# Altium PCB PCB(含有CH340).pcbdoc
Units mil, origin at the board's own origin, x right, y up, seen from the top; angles counter-clockwise.
Board outline 3285.7 x 2277.93 mil, 2 copper layers (Top Layer, Bottom Layer); 53 components, 51 nets, 198 pads, 38 vias.
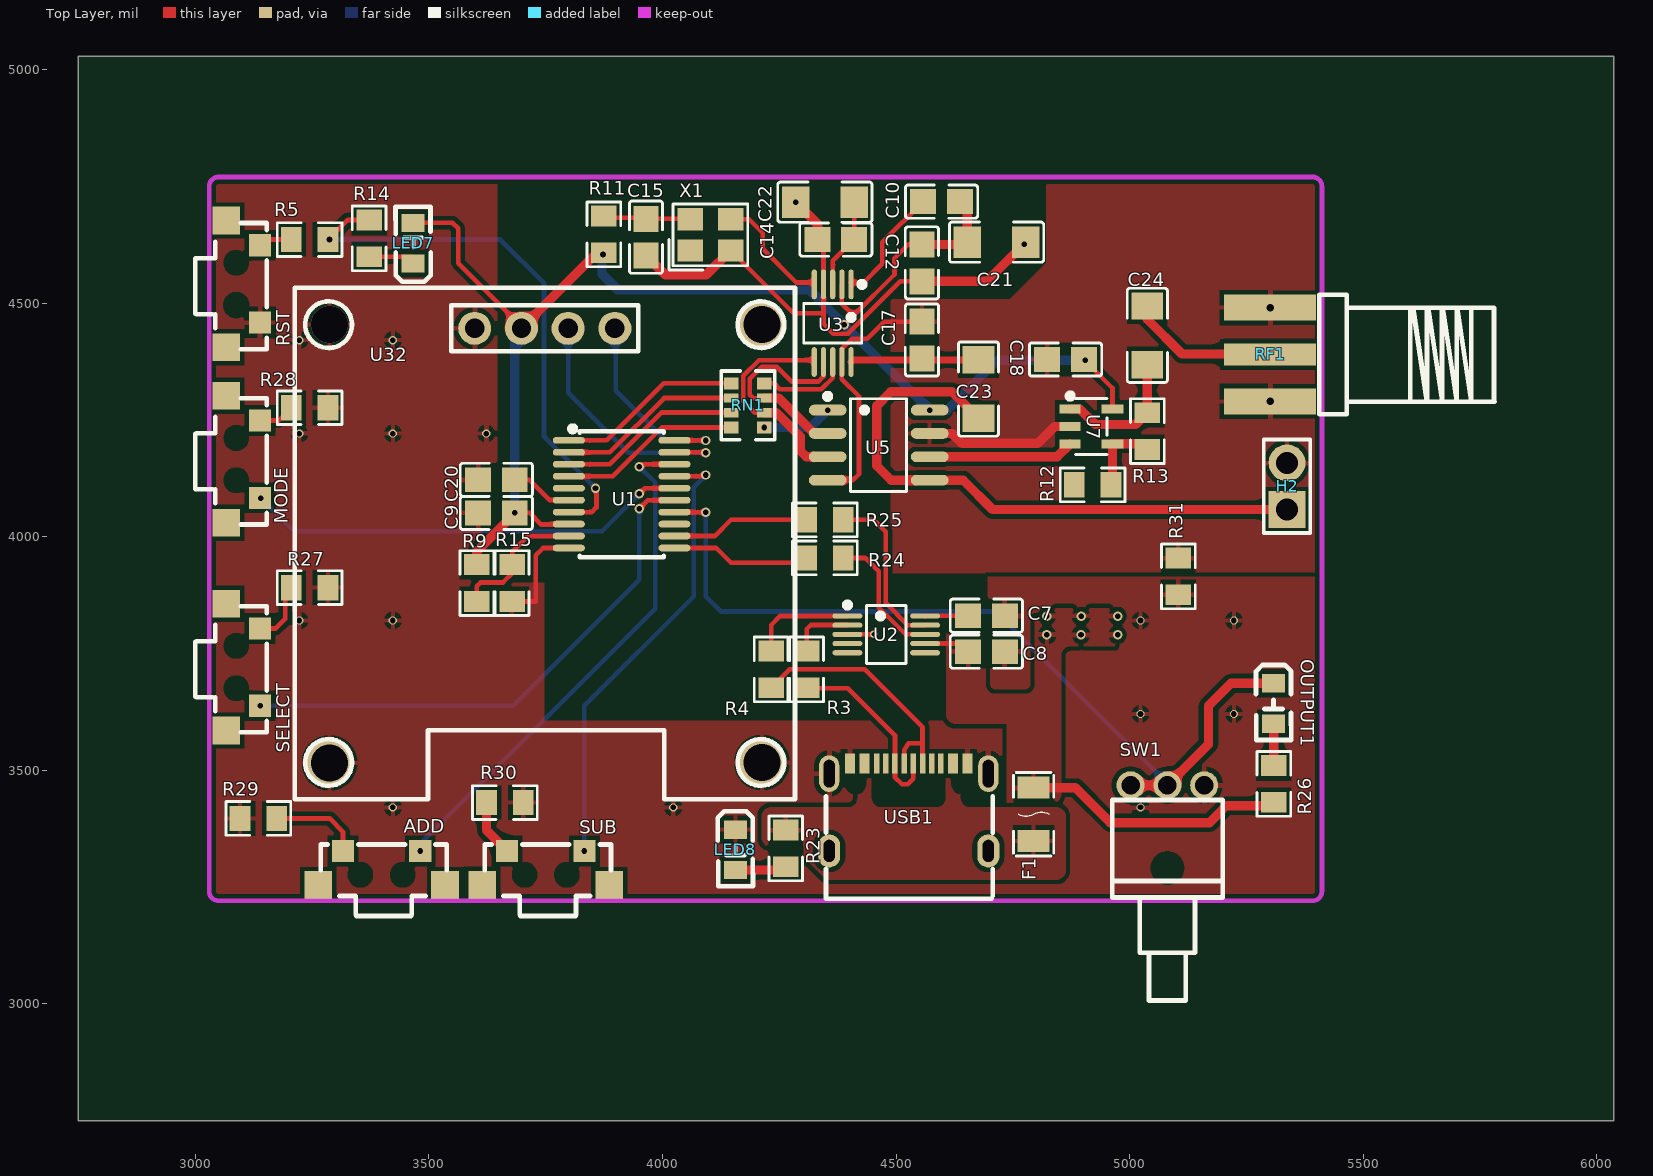
[diagram p0: Top Layer view]
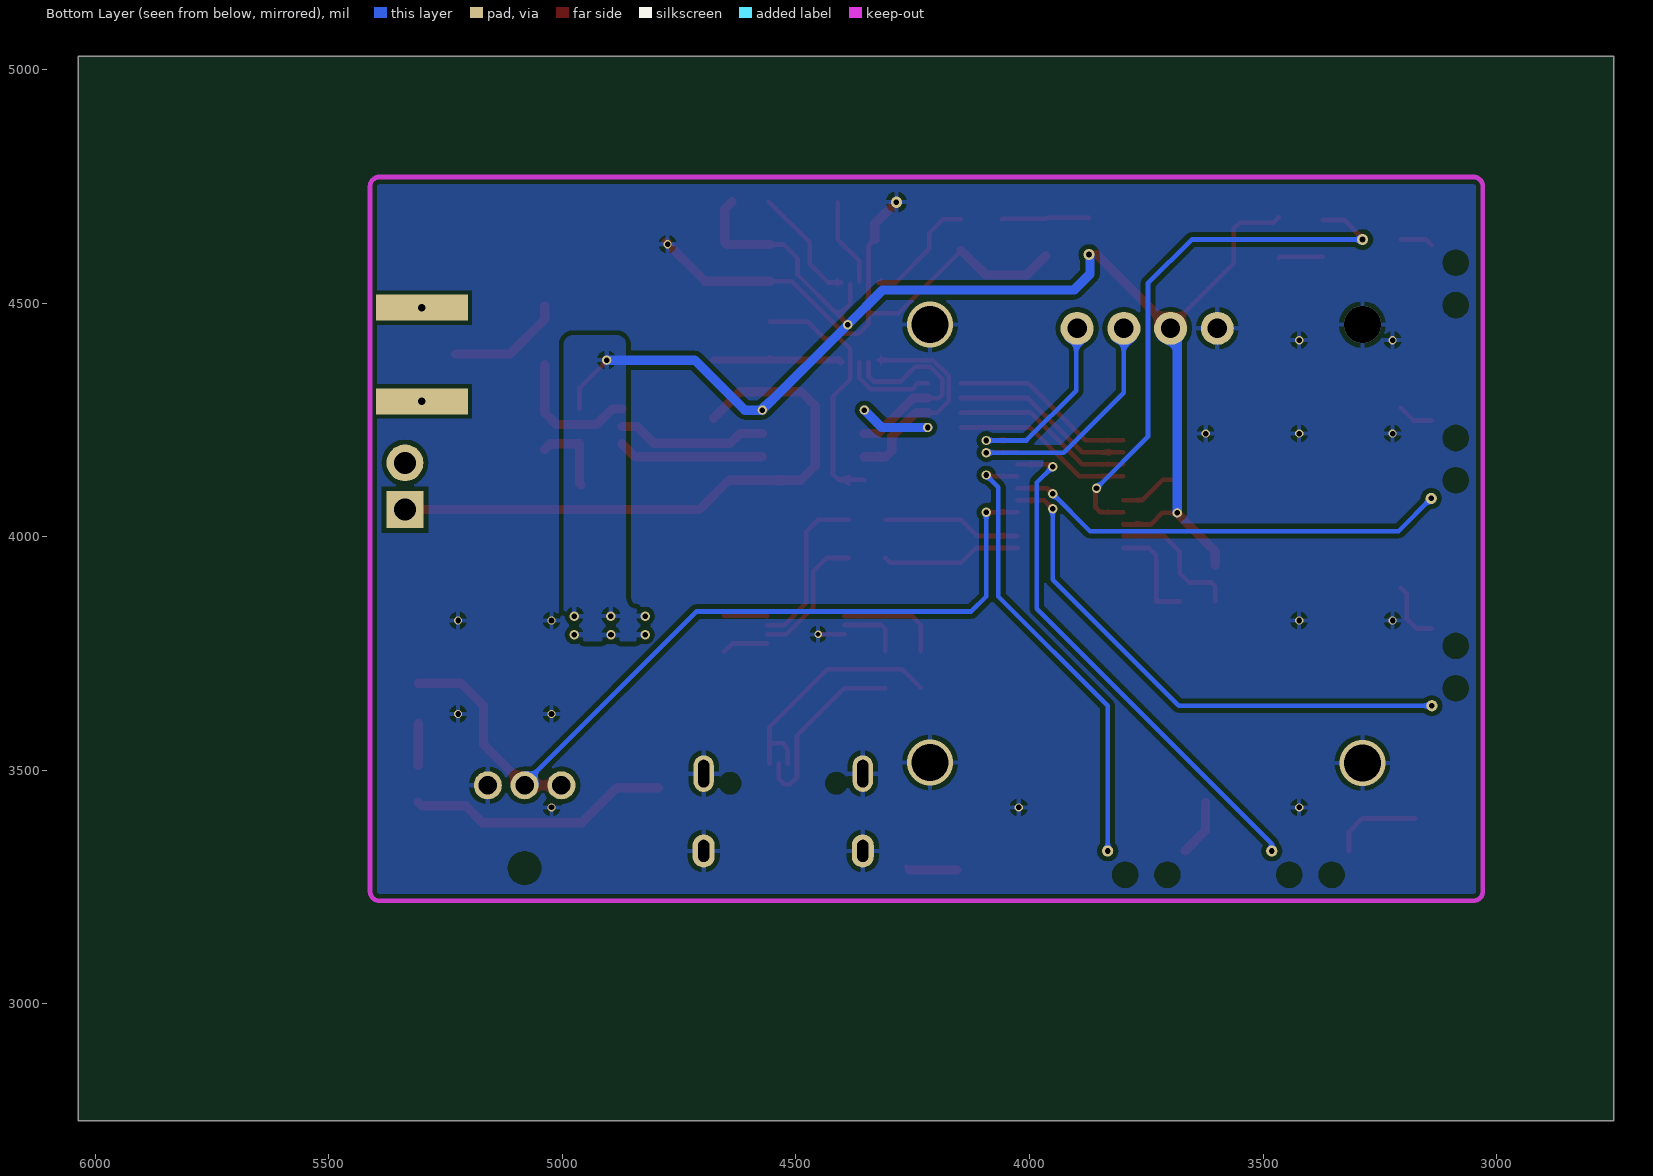
[diagram p1: Bottom Layer view, seen from below]

## Layer stack, top to bottom
Top Solder Mask Layer: solder mask 0.4, Solder Resist, Dk 3.5
Top Layer: signal copper 1.4
Dielectric1: dielectric 12.6, FR-4, Dk 4.8
Bottom Layer: signal copper 1.4
Bottom Solder Mask Layer: solder mask 0.4, Solder Resist, Dk 3.5

## Board outline
6035.7,2750 2750,2750 2750,5027.93 6035.7,5027.93

## Design rules (kind name [scope] priority, off if disabled: settings)
Clearance [All] p1: gap=10 ignorepadtopadclearanceinfootprint=FALSE except(0: Arc-Hole Track-Hole SMDPad-Hole THPad-Hole Via-Hole Fill-Hole Poly-Hole Region-Hole Text-Hole)
PolygonConnect [All] p1: connectstyle=Relief reliefconductorwidth=10 reliefentries=4 polygonreliefangle="90 Angle" airgapwidth=10
RoutingVias [All] p1: holewidth=28 width=50 viastyle="Through Hole" minholewidth=28 minwidth=50 maxholewidth=28 maxwidth=50
SolderMaskExpansion [All] p1: expansion=4 istentingtop=FALSE
Width [All] p1: maxlimit=50 minlimit=10 preferedwidth=10
30 further rules are at their usual default settings.

## Components (designator, comment, footprint, x,y, rotation, side; value= is the part's Value field where it differs from the comment)
ADD "TS-1087B-B2D2" KEY-SMD_4P-L7.8-W2.8-P4.20-EH 3398.92,3290.93 r180 top
C7 "0805B104K500NT" C0805 4693.33,3830.93 r0 top
C8 "0805B104K500NT" C0805 4693.33,3753.84 r0 top
C9 "0805B104K500NT" C0805 3644.56,4050.93 r0 top
C10 "0805B104K500NT" C0805 4597.34,4717.02 r180 top
C12 "0805B104K500NT" C0805 4555.42,4585.93 r90 top
C14 "0805B104K500NT" C0805 4371.03,4635.93 r0 top
C15 "0805B104K500NT" C0805 3964.86,4640.93 r90 top
C17 "0805B104K500NT" C0805 4555.42,4420.93 r270 top
C18 "0805B104K500NT" C0805 4862.7,4379.2 r180 top
C20 "0805B104K500NT" C0805 3644.56,4121.76 r0 top
C21 "CL31A106KBHNNNE" C1206 4715.18,4630.22 r180 top
C22 "CL31A106KBHNNNE" C1206 4347.7,4715.93 r0 top
C23 "CL31A106KBHNNNE" C1206 4676.34,4315.93 r270 top
C24 "CL31A106KBHNNNE" C1206 5037.7,4430.93 r90 top
F1 "nSMD010" F1206 4794.41,3405.93 r270 top
H2 "PZ254V-11-02P" HDR-TH_2P-P2.54-V-M 5336.7,4108 r90 top
LED7 "LED_B" LED_0805 3466.7,4629.89 r90 top
LED8 "LED_B" LED_0805 4155.92,3327.89 r270 top
MODE "TS-1087B-B2D2" KEY-SMD_4P-L7.8-W2.8-P4.20-EH 3102.7,4165.93 r90 top
OUTPUT1 "LED_B" LED_0805 5307.7,3640.9 r270 top
R3 "0805W8F1001T5E" R0805 4308.66,3715.93 r270 top
R4 "0805W8F1001T5E" R0805 4232.7,3715.93 r270 top
R5 "0805W8F1001T5E" R0805 3245.02,4635.93 r0 top
R9 "0805W8F1001T5E" R0805 3602.7,3900.73 r270 top
R11 "0805W8F1001T5E" R0805 3874.7,4647.14 r90 top
R12 "0805W8F1001T5E" R0805 4920.74,4110.93 r0 top
R13 "0805W8F1001T5E" R0805 5037.7,4225.81 r90 top
R14 "0805W8F1001T5E" R0805 3372.45,4638.54 r90 top
R15 "0805W8F1001T5E" R0805 3678.33,3900.73 r270 top
R23 "0805W8F1001T5E" R0805 4263.93,3333 r90 top
R24 "0805W8F1001T5E" R0805 4347.7,3954.52 r0 top
R25 "0805W8F1001T5E" R0805 4347.7,4035.93 r0 top
R26 "0805W8F1001T5E" R0805 5308.38,3470.93 r270 top
R27 "0805W8F1001T5E" R0805 3245.02,3890.93 r180 top
R28 "0805W8F1001T5E" R0805 3245.02,4275.93 r180 top
R29 "0805W8F1001T5E" R0805 3135.32,3396.93 r0 top
R30 "0805W8F1001T5E" R0805 3662.7,3430.93 r180 top
R31 "0805W8F0000T5E" R0805 5104.02,3915.15 r90 top
RF1 "KH-SMA-KE8-G" CONN-SMD_KH-SMA-KE8-G 5300.7,4389.93 r270 top
RN1 "4D03WGJ0331T5E" RES-ARRAY-SMD_0603-8P-L3.2-W1.6-BL 4182.7,4280.93 r270 top
RST "TS-1087B-B2D2" KEY-SMD_4P-L7.8-W2.8-P4.20-EH 3102.7,4540.93 r90 top
SELECT "TS-1087B-B2D2" KEY-SMD_4P-L7.8-W2.8-P4.20-EH 3102.7,3720.93 r90 top
SUB "TS-1087B-B2D2" KEY-SMD_4P-L7.8-W2.8-P4.20-EH 3750.19,3290.93 r180 top
SW1 "XKB5858-Z-C" SW-TH_XKB5858-Z-C 5080.7,3467.93 r180 top
U1 "STC8H8K64U-45I-TSSOP20" TSSOP-20_L6.5-W4.4-P0.65-LS6.5-BL 3912.7,4090.93 r270 top
U2 "CH340E" MSOP-10_L3.0-W3.0-P0.50-LS5.0-BL 4479.03,3790.93 r270 top
U3 "AD9833BRMZ" MSOP-10_L3.0-W3.0-P0.50-LS5.0-BL 4364.37,4456.93 r180 top
U5 "MCP41010T-I/SN" SOIC-8_L4.9-W3.9-P1.27-LS6.0-BL 4462.7,4195.93 r270 top
U7 "CBM8051AST5" SOT-23-5_L3.0-W1.7-P0.95-LS2.8-BL 4917.7,4235.93 r270 top
U32 "HS96L03W2C03" OLED-TH_L27.8-W27.2-P2.54_C9900033791 3748.19,4445.93 r0 top
USB1 "TYPE-C 16PIN 2MD(073)" USB-C-SMD_TYPE-C-6PIN-2MD-073 4527.16,3420.93 r0 top
X1 "SX32Y025000BK1T" CRYSTAL-SMD_4P-L3.2-W2.5-BL 4102.7,4645.93 r0 top

## Footprints (in the part's own frame and the unit in brackets; to place one, negate y for a bottom-side part, rotate by r counter-clockwise, add the part's x,y. Pads: shape width x height; smd on the part's side, far side on the other; paste and mask are expansions set on the pad)
C0805 [mm]
  rect 1.41x1.35 smd paste-100 mask+0.051: 1(-1,0) 2(1,0)
  silkscreen extent -1.96,-0.9 1.96,0.9
C1206 [mm]
  rect 1.485x1.728 smd paste-100 mask+0.051: 1(-1.593,0) 2(1.593,0)
  silkscreen extent -2.56,-1.09 2.56,1.09
CONN-SMD_KH-SMA-KE8-G [mm]
  rect 1.4x5 smd paste+0 mask+0.05: 1(-2.55,0) 2(2.55,0)
  rect 1.4x5 smd far side paste+0 mask+0.05: 3(-2.55,0) 4(2.55,0)
  rect 1.2x5 smd paste+0 mask+0.05: 5(0,0)
  silkscreen extent -3.25,2.67 3.25,12.19
CRYSTAL-SMD_4P-L3.2-W2.5-BL [mm]
  rect 1.4x1.2 smd mask+0.076: 1(-1.1,-0.85) 2(1.1,-0.85) 3(1.1,0.85) 4(-1.1,0.85)
  silkscreen extent -2.26,-1.91 2.03,1.68
F1206 [mm]
  rect 1.19x1.728 smd paste+0 mask+0.051: 1(-1.445,0) 2(1.445,0)
  silkscreen extent -2.27,-1.09 2.27,1.09
HDR-TH_2P-P2.54-V-M [mm]
  rect 2x2 hole 1.2 mask+0.076: 1(-1.27,0)
  round 2 hole 1.2 mask+0.076: 2(1.27,0)
  silkscreen extent -2.54,-1.27 2.54,1.27
KEY-SMD_4P-L7.8-W2.8-P4.20-EH [mm]
  rect 1.2x1.2 smd mask+0.076: 1(-2.101,-0.924) 2(2.101,-0.924)
  rect 1.5x1.5 smd mask+0.076: 3(-3.449,0.924) 4(3.449,0.924)
  silkscreen extent -3.55,-1.27 3.31,2.61
LED_0805 [mm]
  rect 1x1.25 smd paste+0 mask+0.051: 1(-1.15,0.005) 2(1.05,0.005)
  silkscreen extent -2.15,-0.94 1.93,0.97
MSOP-10_L3.0-W3.0-P0.50-LS5.0-BL [mm]
  oval 0.28x1.62 smd mask+0.076: 1(-1,-2.11) 2(-0.5,-2.11) 3(0,-2.11) 4(0.5,-2.11) 5(1,-2.11) 6(1,2.11) 7(0.5,2.11) 8(0,2.11) 9(-0.5,2.11) 10(-1,2.11)
  silkscreen extent -1.74,-2.26 1.58,1.07
OLED-TH_L27.8-W27.2-P2.54_C9900033791 [mm]
  round 1.8 hole 1.05 paste+0 mask+0.05: 1(-3.81,0) 2(-1.27,0) 3(1.27,0) 4(3.81,0)
  silkscreen extent -13.6,-25.6 13.6,2.2
R0805 [mm]
  rect 1.133x1.377 smd paste-100 mask+0.051: 1(-1,0) 2(1,0)
  silkscreen extent -1.76,-0.92 1.76,0.92
RES-ARRAY-SMD_0603-8P-L3.2-W1.6-BL [mm]
  rect 0.65x0.8 smd mask+0.076: 1(-1.2,-0.9) 4(1.2,-0.9) 5(1.2,0.9) 8(-1.2,0.9)
  rect 0.5x0.8 smd mask+0.076: 2(-0.4,-0.9) 3(0.4,-0.9) 6(0.4,0.9) 7(-0.4,0.9)
  silkscreen extent -1.87,-1.45 1.87,1.47
SOIC-8_L4.9-W3.9-P1.27-LS6.0-BL [mm]
  oval 0.588x2.045 smd mask+0.076: 1(-1.905,-2.772) 2(-0.635,-2.772) 3(0.635,-2.772) 4(1.905,-2.772) 5(1.905,2.772) 6(0.635,2.772) 7(-0.635,2.772) 8(-1.905,2.772)
  silkscreen extent -2.8,-2.92 2.53,1.52
SOT-23-5_L3.0-W1.7-P0.95-LS2.8-BL [mm]
  rect 0.49x1.157 smd mask+0.076: 1(-0.95,-1.154) 2(0,-1.154) 3(0.95,-1.154)
  rect 0.49x1.175 smd mask+0.076: 4(0.95,1.154) 5(-0.95,1.154)
  silkscreen extent -1.8,-1.29 1.53,0.85
SW-TH_XKB5858-Z-C [mil]
  round 60 hole 39.37 mask+3: 1(78.74,0) 2(0,0) 3(-78.74,0)
  silkscreen extent -118,31 118,461
TSSOP-20_L6.5-W4.4-P0.65-LS6.5-BL [mil]
  oval 14.33x68.58 smd mask+3: 1(-115.16,-113.03) 2(-89.57,-113.03) 3(-63.98,-113.03) 4(-38.39,-113.03) 5(-12.79,-113.03) 6(12.8,-113.03) 7(38.39,-113.03) 8(63.98,-113.03) 9(89.57,-113.03) 10(115.16,-113.03) 11(115.16,113.03) 12(89.57,113.03) 13(63.98,113.03) 14(38.39,113.03) 15(12.8,113.03) 16(-12.79,113.03) 17(-38.39,113.03) 18(-63.98,113.03) 19(-89.57,113.03) 20(-115.16,113.03)
  silkscreen extent -146,-111 135,90
USB-C-SMD_TYPE-C-6PIN-2MD-073 [mm]
  rect 0.55x1.1 smd paste-100 mask+0.05: 1(-3.2,2.375) 2(-2.4,2.375) 11(2.4,2.375) 12(3.2,2.375)
  rect 0.3x1.1 smd paste-100 mask+0.05: 3(-1.75,2.375) 4(-1.25,2.375) 5(-0.75,2.375) 6(-0.25,2.375) 7(0.25,2.375) 8(0.75,2.375) 9(1.25,2.375) 10(1.75,2.375)
  oval 1.1x2 hole 0.6 slot 1.5 at 90 deg paste+0 mask+0.05: 13(-4.325,1.825) 14(4.325,1.825)
  oval 1.2x1.8 hole 0.6 slot 1.2 at 90 deg paste+0 mask+0.05: 13(-4.325,-2.375) 14(4.325,-2.375)
  silkscreen extent -4.5,-4.97 4.57,0.6

## Free pads (board coordinates)
  round 20 hole 12 mask+3: 21(3683.93,4050.93) 27(4218.13,4233.69) 28(4353.55,4270.93) 28(4571.85,4270.93) 28(4905.05,4377.93)
  round 24 hole 12 mask+3: 22(3287.35,4635.93) 23(3140.37,4081.93) 24(3139.07,3638.23) 25(3481.62,3327.3) 26(3832.89,3327.3) 29(3872.7,4603.93)

## Via types
v1: diameter 17.72, hole 12.01, Top Layer to Bottom Layer, 15 vias
v2: diameter 20, hole 12.01, Top Layer to Bottom Layer, 9 vias
v3: diameter 20, hole 11.81, Top Layer to Bottom Layer, 6 vias
v4: diameter 98.43, hole 78.74, Top Layer to Bottom Layer, 3 vias
v5: diameter 32, hole 15.75, Top Layer to Bottom Layer, 2 vias
v6: diameter 78.74, hole 78.74, Top Layer to Bottom Layer, 1 vias
v7: diameter 24, hole 12, Top Layer to Bottom Layer, 1 vias
v8: diameter 16, hole 10, Top Layer to Bottom Layer, 1 vias

## Nets (pads, with @x,y where several pads share a name; then routed paths per layer and width w, separated by ;. In a path a pad name is that pad's centre, name@x,y a point inside that pad or via, vN(x,y) a via of type N, cw(c..) or ccw(c..) an arc to the next point about the centre after c; other vN are vias at no path point)
$1N1828: R4.1 U2.1 | length 226.9
  Top Layer w10: R4.1 4232.7,3810.93 4252.07,3830.3 U2.1
$1N1837: R3.1 U2.2 | length 138
  Top Layer w10: R3.1 4308.66,3802.37 4317.23,3810.93 4395.64,3810.93 U2.2
$1N1949: C7.1 U2.10 | length 92.1
  Top Layer w10: U2.10 4562.73,3830.93 C7.1
$1N2559: R5.1 RST.2 | length 71.7
  Top Layer w10: RST.2 3151.37,4635.93 R5.1
$1N4940: R9.2 R15.1 U1.9 | length 301
  Top Layer w10: R9.2 3602.7,3893.93 3610.7,3901.93 3658.7,3901.93 3678.33,3921.56 R15.1 3678.33,3967.56 3712.13,4001.36 U1.9
$1N4975: LED7.1 R14.1 | length 95.1
  Top Layer w10: R14.1 3463.88,4599.17 LED7.1@3466.49,4596.56
$1N5024: R4.2 USB1.6 USB1.8 | length 545.3
  Top Layer w10: R4.2 4272.07,3715.93 4432.7,3715.93 4556.7,3591.93 4556.7,3557.93 ; USB1.6 4517.32,3542.55 4526.7,3557.93 4556.7,3557.93 ; USB1.8 4556.7,3557.93
$1N5036: R3.2 USB1.5 USB1.7 | length 403.9
  Top Layer w10: R3.2 4309.29,3675.93 4396.7,3675.93 4497.64,3574.99 USB1.5 4497.64,3484.99 4512.7,3469.93 4524.7,3469.93 4537.01,3482.24 USB1.7
$1N5128: C20.2 U1.6 | length 133.8
  Top Layer w10: C20.2 3714.87,4121.76 3758.5,4078.13 U1.6
$1N6710: LED8.2 R23.1 | length 110.7
  Top Layer w10: R23.1@4256.85,3286.55 R23.1
  Top Layer w20: LED8.2 R23.1@4256.85,3286.55
$1N6788: R24.2 U2.8 | length 288.2
  Top Layer w10: R24.2 4434.1,3954.52 4462.7,3925.93 4462.7,3848.45 4520.21,3790.93 U2.8
$1N6833: R25.2 U2.9 | length 357.9
  Top Layer w10: R25.2 4452.7,4035.93 4477.7,4010.93 4477.7,3858.13 4525.21,3810.61 U2.9
$2N1265: C10.2 U3.1 | length 254.4
  Top Layer w10: U3.1@4402.07,4544 4430.77,4544 4470.7,4583.93 4470.7,4629.75 C10.2
$2N1528: C14.2 C22.2 U3.3 | length 188.9
  Top Layer w10: U3.3@4364.7,4546 4364.7,4590.23 C14.2 C22.2
$2N1564: U3.5 X1.3 | length 253.3
  Top Layer w10: X1.3 4185.23,4679.4 4214.7,4649.93 4214.7,4615.93 4286.7,4543.93 ; 4286.77,4544 U3.5@4323.33,4544
$2N1666: C15.2 R11.2 X1.4 | length 188.1
  Top Layer w10: R11.2@3872.7,4682.74 3962.42,4682.74 C15.2 4058.48,4680.3 X1.4
$2N1783: C17.2 C23.1 U3.10 | length 277
  Top Layer w10: C17.2 C17.2@4558.35,4378.63
  Top Layer w15: U3.10 4407.74,4377.86 4551.72,4377.86 C17.2 ; C17.2@4558.35,4378.63 C23.1
$2N1802: U5.6 U7.3 | length 311.9
  Top Layer w20: U5.6 4844.68,4170.93 U7.3
$2N1974: R12.2 R13.1 U7.4 | length 168.4
  Top Layer w20: R12.2 4963.12,4113.94 U7.4 5025.61,4198.53 R13.1
$2N2021: C24.1 R13.2 U7.1 | length 292.8
  Top Layer w20: U7.1 4893.3,4273.33 4926.7,4239.93 5012.45,4239.93 R13.2 C24.1
$4N4589: OUTPUT1.2 R26.1 | length 89.5
  Top Layer w20: OUTPUT1.2 5308.38,3599.08 R26.1
$4N4834: R30.2 SUB.2 | length 121.9
  Top Layer w20: R30.2 3623.33,3371.46 SUB.2
$4N4886: ADD.2 R29.2 | length 194.5
  Top Layer w10: R29.2 3287.7,3396.93 3316.22,3368.4 ADD.2
$4N4938: MODE.2 R28.2 | length 77.9
  Top Layer w10: MODE.2 3178.35,4248.63 R28.2
$4N4990: R27.2 SELECT.2 | length 134.4
  Top Layer w10: SELECT.2 3172.4,3803.63 3192.7,3823.93 3192.7,3877.97 R27.2
AGND: C17.1 C18.2 H2.2 R31.2 RF1.1 RF1.2 RF1.3 RF1.4 U3.9 U5.4 U5.7 U7.2 | length 875.3
  Top Layer w10: U5.4 4354.55,4121.93 4408.7,4121.93 4420.7,4133.93 4420.7,4300.33 4384.05,4336.97 U3.9 4384.05,4401.89 4406.09,4423.93 4438.06,4423.93 4474.43,4460.3 C17.1
  Top Layer w20: U5.7 4619.7,4220.93 4640.7,4199.93 4803.5,4199.93 4839.5,4235.93 U7.2
  other v5: 5300.7,4289.54 5300.7,4490.33
CS: pad.27 pad.28@4353.55,4270.93 RN1.5 U5.1 | length 150.8
  Bottom Layer w20: pad.27 4316.31,4233.69 pad.28@4353.55,4270.93
FSYNC: RN1.8 U3.8 | length 195.7
  Top Layer w10: RN1.8 4238.88,4328.17 4251.52,4315.53 4340.29,4315.53 4364.37,4339.61 U3.8
GND: C7.2 C8.2 C9.1 C12.1 C14.1 C15.1 C20.1 C21.1 C22.1 LED8.1 R15.2 R27.1 R28.1 R29.1 R30.1 R31.1 RST.1 SW1.3 U1.10 U2.3 U3.4 U32.1 USB1.1 USB1.12 USB1.13 USB1.14 X1.2 | length 1565.5
  Top Layer w10: R15.2 3728.7,3861.36 3728.7,3959.93 3744.54,3975.77 U1.10 ; X1.2 4280.54,4477.93 4344.7,4477.93 ; C14.1 4344.68,4622.9 U3.4 4344.7,4477.93 ; U2.3 v8(4452.7,3790.93) ; C12.1 4508.99,4546.56 4397.04,4434.61 4366.02,4434.61 4344.7,4455.93 4344.7,4477.93
  Top Layer w20: C15.1 4006.49,4559.93 4093.47,4559.93 X1.2 ; v7(4285,4715.93) 4331.66,4669.27 C14.1 ; C12.1 4694.22,4546.56 C21.1
  other v1: 3423.08,3420.62 4023.08,3420.62 5023.08,3420.62 5023.08,3620.62 5223.08,3620.62 3223.08,3820.62 3423.08,3820.62 5023.08,3820.62 5223.08,3820.62 3223.08,4220.62 3423.08,4220.62 3623.08,4220.62 3223.08,4420.62 3423.08,4420.62 4774.7,4625.93
  other v4: 3287.7,3515.93 4212.79,3516.8 4212.79,4453.8
  other v6: 3287.59,4453.8
P1.0: U1.20 U32.4 | length 437.2
  Top Layer w10: U1.20 4092.54,4206.09 v2(4092.7,4205.93)
  Bottom Layer w10: U32.4@3900.19,4445.93 3900.19,4312.44 4006.7,4205.93 v2(4092.7,4205.93)
P1.1: U1.19 U32.3 | length 552.8
  Top Layer w10: U1.19 4092.13,4180.5 v2(4092.7,4179.93)
  Bottom Layer w10: U32.3@3800.19,4445.93 3798.7,4444.44 3798.7,4307.93 3926.7,4179.93 v2(4092.7,4179.93)
P1.3: U1.5
P1.4: RN1.1 U1.1 | length 398.2
  Top Layer w10: U1.1 3880.86,4206.09 4002.94,4328.17 RN1.1
P1.5: RN1.2 U1.2 | length 395.7
  Top Layer w10: U1.2 3887.27,4180.5 4003.45,4296.68 RN1.2
P1.6: RN1.3 U1.3 | length 393.9
  Top Layer w10: U1.3 3887.68,4154.91 3998.7,4265.93 4146.51,4265.93 RN1.3
P1.7: RN1.4 U1.4 | length 390.8
  Top Layer w10: U1.4 3894.09,4129.32 3998.46,4233.69 RN1.4
P3.2: U1.13
P3.3: OUTPUT1.1 SW1.1 SW1.2 U1.14 | length 1848.7
  Top Layer w10: U1.14 4026.34,4051.93 v2(4092.7,4051.93)
  Top Layer w20: SW1.1 SW1.2 5168.7,3555.93 5168.7,3637.93 5216.94,3686.18 OUTPUT1.1
  Bottom Layer w10: v2(4092.7,4051.93) 4092.7,3871.93 4124.7,3839.93 4712.7,3839.93 5079.21,3473.41 SW1.2@5079.21,3467.93
P3.4: pad.24 SELECT.1 U1.15 | length 1157.9
  Top Layer w10: v2(3950.7,4059.93) 3968.9,4078.13 U1.15
  Bottom Layer w10: pad.24 3681,3638.23 3950.7,3907.93 v2(3950.7,4059.93)
P3.5: MODE.1 pad.23 U1.16 | length 954.2
  Top Layer w10: v2(3950.7,4091.93) 3962.49,4103.72 U1.16
  Bottom Layer w10: pad.23@3139.07,4083.23 pad.23 3210.37,4011.93 3870.7,4011.93 v2(3950.7,4091.93)
P3.6: pad.26 SUB.1 U1.17 | length 980.3
  Top Layer w10: U1.17 4090.09,4129.32 v2(4092.7,4131.93)
  Bottom Layer w10: pad.26 3832.89,3638.12 4066.7,3871.93 4066.7,4105.93 v2(4092.7,4131.93)
P3.7: ADD.1 pad.25 U1.18 | length 1122.2
  Top Layer w10: v2(3950.7,4149.93) 3955.68,4154.91 U1.18
  Bottom Layer w10: pad.25 3481.62,3342.86 3984.7,3845.93 3984.7,4115.93 v2(3950.7,4149.93)
RST: pad.22 R5.2 R14.2 U1.7 | length 1192.7
  Top Layer w10: R5.2 3326.37,4677.91 R14.2 ; U1.7 3848.7,4052.54 3858.7,4062.54 3858.7,4101.93 v2(3856.7,4103.93)
  Bottom Layer w10: pad.22 3652.7,4635.93 3746.7,4541.93 3746.7,4213.93 v2(3856.7,4103.93)
RXD: R24.1 U1.11 | length 300.2
  Top Layer w10: U1.11 4114.86,3975.77 4146.7,3943.93 4297.73,3943.93 R24.1
SCLK: RN1.7 U3.7 U5.2 | length 453.4
  Top Layer w10: RN1.7 4217.38,4295.93 4194.7,4295.93 4186.7,4303.93 4186.7,4338.13 4212.43,4363.86 4244.77,4363.86 4276.7,4331.93 4333.66,4331.93 4344.7,4342.97 U3.7
  Top Layer w20: RN1.7 4249.11,4296.68 4324.86,4220.93 U5.2
SDATA: RN1.6 U3.6 U5.3 | length 466.7
  Top Layer w10: RN1.6 4197.38,4265.18 4172.7,4289.87 4172.7,4343.93 4206.63,4377.86 U3.6@4323.33,4377.86
  Top Layer w20: RN1.6 4243.88,4265.18 4294.7,4214.36 4294.7,4183.93 4307.7,4170.93 U5.3
TXD: R25.1 U1.12 | length 296.9
  Top Layer w10: U1.12 4112.13,4001.36 4146.7,4035.93 R25.1
VBUS: F1.2 R23.2 USB1.2 USB1.11
VCC: C8.1 C9.2 C10.1 C12.2 C18.1 C21.2 F1.1 LED7.2 pad.21 pad.28@4571.85,4270.93 pad.28@4905.05,4377.93 pad.29 R9.1 R11.1 R26.2 U1.8 U2.7 U3.2 U5.8 U7.5 U32.2 | length 3855.3
  Top Layer w10: LED7.2@3466.49,4683.18 3477.74,4671.93 3550.55,4671.93 3562.7,4659.79 3562.7,4585.42 3700.19,4447.93 U32.2@3700.19,4445.93 ; pad.21 3715.7,4050.93 3740.7,4025.93 3798.65,4025.93 U1.8 ; R11.1@3856.26,4604 pad.29@3872.7,4604 ; v2@4384.05,4458.73 v2(4389.17,4453.61) 4409.07,4473.52 ; U3.2 4384.05,4498.54 4409.07,4473.52 ; C12.2 4526.07,4625.3 4496.7,4595.93 4496.7,4561.14 4409.07,4473.52 ; U2.7 4636.56,3771.24 C8.1 ; C18.1 4963.12,4318.15 U7.5
  Top Layer w20: R9.1 3602.7,3968.39 3683.93,4049.62 pad.21 ; U32.2@3700.19,4447.93 R11.1@3856.26,4604 ; C12.2 4647.56,4625.3 C21.2 4652.48,4701.25 C10.1 ; F1.1 4883.81,3462.82 4958.7,3387.93 5170.7,3387.93 5206.7,3423.93 5300.75,3423.93 R26.2
  Bottom Layer w20: pad.21 3683.93,4431.67 U32.2@3700.19,4447.93 ; pad.29@3870.7,4601.93 3870.7,4561.93 3904.7,4527.93 4314.85,4527.93 v2(4389.17,4453.61) 4571.85,4270.93 4609.7,4270.93 4716.7,4377.93 pad.28@4905.05,4377.93
  other v3: 4822.7,3789.93 4895.79,3789.93 4974.12,3789.93 4822.7,3829.93 4896.2,3829.93 4974.12,3829.93
VOUT: C24.2 RF1.5 | length 249.1
  Top Layer w20: C24.2 5037.7,4465.35 5112.11,4390.94 RF1.5@5227.7,4390.94
VOUTS: C23.2 H2.1 U5.5 | length 1298.5
  Top Layer w20: C23.2 4619.64,4309.93 4488.7,4309.93 4458.7,4279.93 4458.7,4151.93 4489.7,4120.93 U5.5 4643.7,4120.93 4706.62,4058 H2.1
pads on no net: ADD.3 ADD.4 MODE.3 MODE.4 R12.1 RST.3 RST.4 SELECT.3 SELECT.4 SUB.3 SUB.4 U2.4 U2.5 U2.6 USB1.3 USB1.4 USB1.9 USB1.10 X1.1

## Polygon pours and split planes (outlines as drawn)
VBUS on Top Layer "Top Layer-VBUS" (solid, remove dead copper, pour order 0): 4232.7,3420.93 4397.7,3420.93 ccw(c4397.7,3440.93) 4417.7,3440.93 4417.7,3557.49 4447.31,3557.49 4447.31,3440.93 ccw(c4467.31,3440.93) 4467.31,3420.93 4586.77,3420.93 ccw(c4586.77,3440.93) 4606.77,3440.93 4606.77,3560.93 4637.8,3560.93 4637.8,3440.87 ccw(c4657.8,3440.87) 4657.8,3420.87 4842.7,3420.87 cw(c4842.7,3400.87) 4862.7,3400.87 4862.7,3285.93 cw(c4842.7,3285.93) 4842.7,3265.93 4358.28,3265.93 cw(c4358.28,3285.93) 4344.14,3271.79 4308.55,3307.38 cw(c4322.7,3321.52) 4302.7,3321.52 4302.7,3336.02 4232.7,3336.02 cw(c4232.7,3356.02) 4212.7,3356.02 4212.7,3400.93 cw(c4232.7,3400.93)
VCC on Top Layer "Top Layer-VCC" (solid, remove dead copper, pour order 1): 4737.04,3429.8 4833.1,3429.8 ccw(c4833.1,3449.8) 4853.1,3449.8 4853.1,3745.64 cw(c4873.1,3745.64) 4873.1,3765.64 4977.1,3765.64 ccw(c4977.1,3785.64) 4997.1,3785.64 4997.1,3826.84 ccw(c4977.1,3826.84) 4977.1,3846.84 4817.1,3846.84 ccw(c4817.1,3826.84) 4797.1,3826.84 4797.1,3683.54 cw(c4777.1,3683.54) 4777.1,3663.54 4711.7,3663.54 cw(c4711.7,3683.54) 4691.7,3683.54 4691.7,3772.09 ccw(c4671.7,3772.09) 4671.7,3792.09 4607.25,3792.09 4607.1,3792.25 4607.1,3619.57 ccw(c4627.1,3619.57) 4627.1,3599.57 4736.42,3599.57 4737.1,3600.25 4737.1,3429.86
GND on Top Layer "Top Layer-GND" (solid, remove dead copper, pour order 3): 3023.08,4777.93 3645.98,4777.93 3645.98,3904.7 3643.22,3901.93 3744.7,3901.93 3746.7,3899.93 3746.7,3605.93 4695.39,3605.93 4695.73,3913.93 5416.7,3913.93 5416.7,3220.62 3023.08,3220.62
GND on Top Layer "Top Layer-GND 1" (solid, remove dead copper, pour order 4): 4370.7,4596.23 4370.7,4595.7 4372.54,4598.07
AGND on Top Layer "Top Layer-AGND" (solid, remove dead copper, pour order 6): 4488.7,4507.93 4743.19,4507.93 4821.19,4585.93 4821.19,4752.43 4822.7,4753.93 5411.41,4753.93 5411.41,3922.64 5410.7,3921.93 4490.7,3921.93 4488.7,3919.93
VCC on Bottom Layer "Bottom Layer-VCC" (solid, remove dead copper, pour order 2): 4862.7,3865.93 cw(c4842.7,3865.93) 4842.7,3845.93 4816.7,3845.93 ccw(c4816.7,3825.93) 4796.7,3825.93 4796.7,3795.99 ccw(c4816.7,3795.99) 4816.7,3775.99 4976.7,3775.99 ccw(c4976.7,3795.99) 4996.7,3795.99 4996.7,4410.93 ccw(c4976.7,4410.93) 4976.7,4430.93 4883.7,4430.93 ccw(c4883.7,4410.93) 4863.7,4410.93 4863.7,3866.93
GND on Bottom Layer "Bottom Layer-GND" (solid, remove dead copper, pour order 5): 3024.7,4775.93 5418.7,4775.93 5418.7,3219.93 5424.7,3213.93 3026.7,3213.93 3024.7,3215.93

## Keep-outs
Board Outline Layer:
  lines w10: 3030.11,3240.62 ccw(c3050.11,3240.62) 3050.11,3220.62 5391.41,3220.62 ccw(c5391.41,3240.62) 5411.41,3240.62 5411.41,4749.85 ccw(c5391.41,4749.85) 5391.41,4769.85 3050.11,4769.85 ccw(c3050.11,4749.85) 3030.11,4749.85 3030.11,3240.62